# Altium PCB versi 1.0.PcbDoc (part 1 of 2)
Units mm, origin at the board's own origin, x right, y up, seen from the top; angles counter-clockwise.
Board outline 227.58 x 135.13 mm, 2 copper layers (Top Layer, Bottom Layer); 54 components, 49 nets, 360 pads, 39 vias.
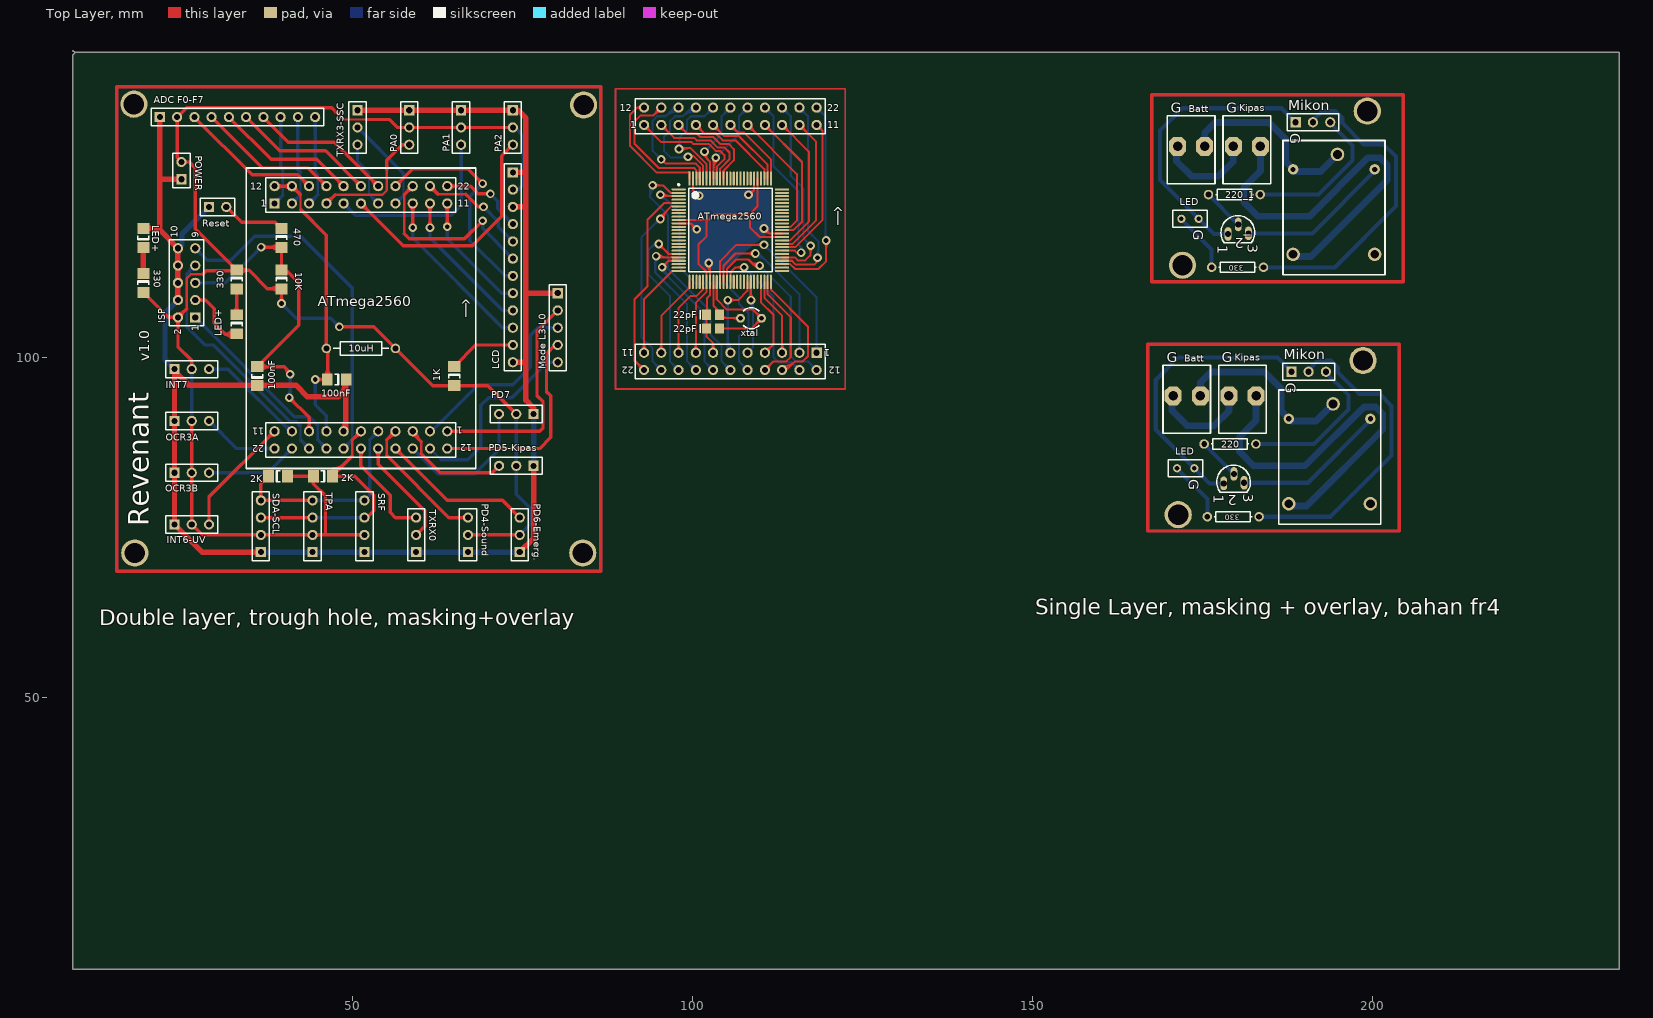
[diagram p0: Top Layer view]
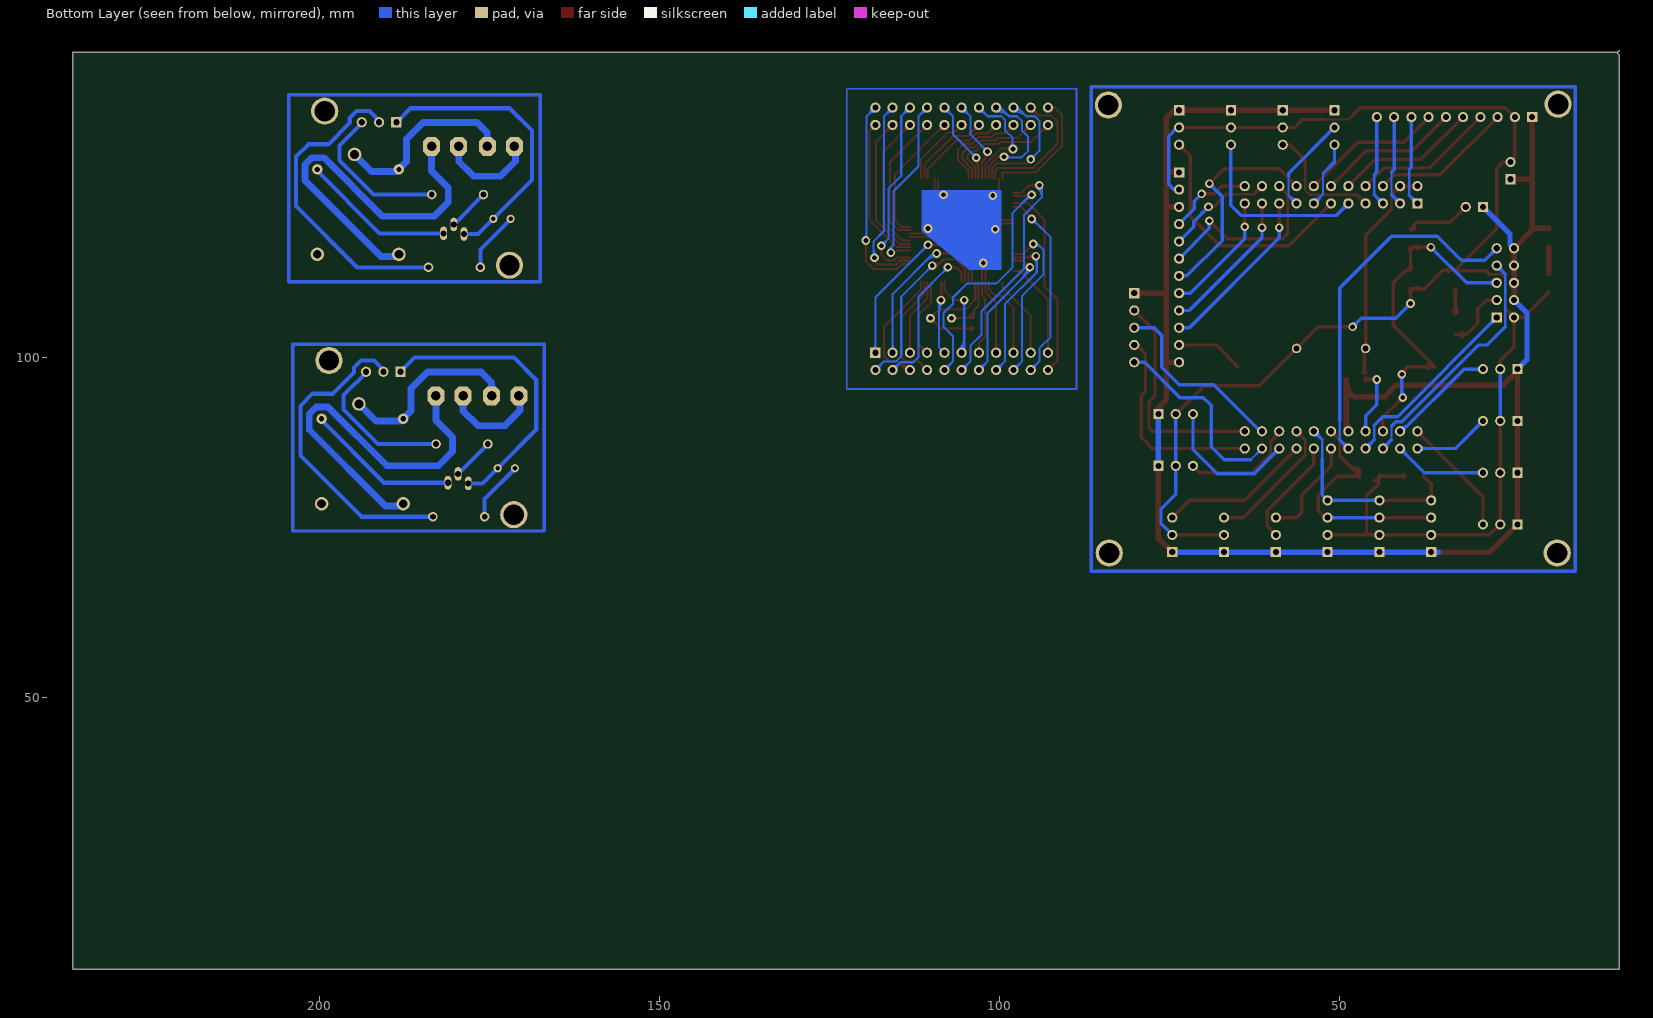
[diagram p1: Bottom Layer view, seen from below]

## Layer stack, top to bottom
Top Layer: signal copper 0.0356
Dielectric: dielectric 0.32, FR-4, Dk 4.8
Bottom Layer: signal copper 0.0356

## Board outline
9.144,144.907 8.763,144.526 8.763,10.033 236.347,10.033 236.347,144.907 9.017,144.907 8.763,145.161

## Design rules (kind name [scope] priority, off if disabled: settings)
Clearance [All] p1: gap=0.254
PolygonConnect [All] p1: connectstyle=Relief reliefconductorwidth=0.254 reliefentries=4 polygonreliefangle="90 Angle"
RoutingVias [All] p1: holewidth=0.711 width=1.27 viastyle="Through Hole" minholewidth=0.711 minwidth=1.27 maxholewidth=0.711 maxwidth=1.27
SilkscreenOverComponentPads [All] p1: minsilkscreentomaskgap=0.254
SolderMaskExpansion [All] p1: expansion=0.102
Width [All] p1: maxlimit=2 minlimit=0.2 preferedwidth=0.5 minimp=50.000000 maximp=50.000000 favimp=50.000000
27 further rules are at their usual default settings.

## Classes and differential pairs
component class Bawah: 100nF "ADC F0-F7" PD6-Emerg.

## Components (designator, comment, footprint, x,y, rotation, side; value= is the part's Value field where it differs from the comment)
1K "Res2" 1206 64.897,97.282 r270 top (schematic designator R.LCD)
2 "Comment" AXIAL-0.3 179.534,76.581 r0 top
2K "Res2" 1206 38.989,82.55 r0 top (schematic designator R.SDA)
2K "Res2" 1206 45.593,82.55 r180 top (schematic designator R.SCL)
10K "Res2" 1206 39.497,111.506 r270 top (schematic designator R.res1)
10uH "10uH" AXIAL-0.4 51.181,101.346 r0 top (schematic designator L)
22pF "Cap" 0805 102.997,104.267 r0 top (schematic designator 22pF1)
22pF "" 0805 102.997,106.299 r0 top
100nF "Cap" 1206 47.625,96.774 r180 top (schematic designator C)
100nF "Cap" 1206 35.941,97.282 r90 top (schematic designator C.res)
220 "Res1" AXIAL-0.3 179.066,87.285 r180 top (schematic designator R1)
220_1 "Res1" AXIAL-0.3 179.701,123.988 r180 top (schematic designator R1)
330 "Res2" 1206 19.177,110.998 r270 top (schematic designator R.Pow)
330 "Res2" 1206 32.893,111.506 r270 top (schematic designator R.ISP)
470 "Res2" 1206 39.497,117.602 r270 top (schematic designator R.res2)
_2 "Comment" AXIAL-0.3 180.169,113.284 r0 top
"ADC F0-F7" "Header 10" HDR1X10 21.59,135.382 r0 top (schematic designator ADC)
ATmega2560 "ATmega2560-16AU" 100A_M 105.537,118.745 r0 top (schematic designator U1)
Batt "" BIGCON2 172.734,94.381 r0 top
Batt "" BIGCON2 173.369,131.084 r0 top
Header.A "Header 11X2A" HDR2X11_CEN#1 118.237,100.711 r180 top
Header.A "Header 11X2A" HDR2X11_CEN#2 63.881,89.154 r180 top
Header.B "Header 11X2A" HDR2X11_CEN#2 92.837,134.239 r0 top
Header.B "Header 11X2A" HDR2X11_CEN#1 38.481,122.682 r0 top
INT6-UV "Header 3" HDR1X3 23.749,75.438 r0 top (schematic designator UVTron)
INT7 "Header 3" HDR1X3 23.749,98.298 r0 top
ISP "ISP" HDR2X5 26.797,105.918 r90 top (schematic designator ISP_S1)
Kipas "" BIGCON2 180.934,94.381 r0 top
Kipas "" BIGCON2 181.569,131.084 r0 top
LCD "Header 12" HDR1X12 73.533,127.254 r270 top
LED "Comment" RAD-0.1 172.537,83.716 r0 top
LED "Comment" RAD-0.1 173.172,120.419 r0 top
LED+ "LED1" 1206 19.177,117.602 r90 top (schematic designator Led.Pow)
LED+ "LED1" 1206 32.893,104.902 r270 top (schematic designator Led.ISP)
Mikon "mikon-driver" HDR1X3 188.087,97.917 r0 top (schematic designator P2)
Mikon "mikon-driver" HDR1X3 188.722,134.62 r0 top (schematic designator P2)
"Mode L3-L0" "Header 4" HDR1X5 80.137,109.474 r270 top (schematic designator DIP.SW)
OCR3A "Header 3" HDR1X3 23.749,90.678 r0 top
OCR3B "Header 3" HDR1X3 23.749,83.058 r0 top
PA0 "Header 3" HDR1X3 58.293,136.398 r270 top
PA1 "Header 3" HDR1X3 65.913,136.398 r270 top
PA2 "Header 3" HDR1X3 73.533,136.398 r270 top
PD4-Sound "Header 3" HDR1X3 66.929,71.374 r90 top (schematic designator Sound)
PD5-Kipas "Header 3" HDR1X3 76.581,84.074 r180 top (schematic designator Kipas)
PD6-Emerg. "Header 3" HDR1X3 74.549,71.374 r90 top (schematic designator Emergency)
PD7 "Header 3" HDR1X3 76.581,91.694 r180 top
POWER "Header 2" HDR1X2 24.765,126.238 r90 top (schematic designator Switch)
Reset "SW-PB" HDR1X2 28.829,122.174 r0 top (schematic designator S1)
SDA-SCL "Header 4" HDR1X4 44.069,71.374 r90 top (schematic designator I2C)
SRF "Header 4" HDR1X4 51.689,71.374 r90 top
TPA "Header 4" HDR1X4 36.449,71.374 r90 top
TXRX0 "Header 3" HDR1X3 59.309,71.374 r90 top (schematic designator USART0)
TXRX3-SSC "Header 3" HDR1X3 50.673,136.398 r270 top (schematic designator SSC)
xtal "XTAL" BCY-W2/D3.1 108.585,105.791 r90 top (schematic designator kristal)

## Footprints (in the part's own frame and the unit in brackets; to place one, negate y for a bottom-side part, rotate by r counter-clockwise, add the part's x,y. Pads: shape width x height; smd on the part's side, far side on the other; paste and mask are expansions set on the pad)
100A_M [mm] "Thin QFP, 100-Leads, Body 14x14mm, Pitch 0.5mm, IPC Low Density"
  oval 2.1x0.3 smd: 1(-7.6,6) 2(-7.6,5.5) 3(-7.6,5) 4(-7.6,4.5) 5(-7.6,4) 6(-7.6,3.5) 7(-7.6,3) 8(-7.6,2.5) 9(-7.6,2) 10(-7.6,1.5) 11(-7.6,1) 12(-7.6,0.5) 13(-7.6,0) 14(-7.6,-0.5) 15(-7.6,-1) 16(-7.6,-1.5) 17(-7.6,-2) 18(-7.6,-2.5) 19(-7.6,-3) 20(-7.6,-3.5) 21(-7.6,-4) 22(-7.6,-4.5) 23(-7.6,-5) 24(-7.6,-5.5) 25(-7.6,-6) 51(7.6,-6) 52(7.6,-5.5) 53(7.6,-5) 54(7.6,-4.5) 55(7.6,-4) 56(7.6,-3.5) 57(7.6,-3) 58(7.6,-2.5) 59(7.6,-2) 60(7.6,-1.5) 61(7.6,-1) 62(7.6,-0.5) 63(7.6,0) 64(7.6,0.5) 65(7.6,1) 66(7.6,1.5) 67(7.6,2) 68(7.6,2.5) 69(7.6,3) 70(7.6,3.5) 71(7.6,4) 72(7.6,4.5) 73(7.6,5) 74(7.6,5.5) 75(7.6,6)
  oval 0.3x2.1 smd: 26(-6,-7.6) 27(-5.5,-7.6) 28(-5,-7.6) 29(-4.5,-7.6) 30(-4,-7.6) 31(-3.5,-7.6) 32(-3,-7.6) 33(-2.5,-7.6) 34(-2,-7.6) 35(-1.5,-7.6) 36(-1,-7.6) 37(-0.5,-7.6) 38(0,-7.6) 39(0.5,-7.6) 40(1,-7.6) 41(1.5,-7.6) 42(2,-7.6) 43(2.5,-7.6) 44(3,-7.6) 45(3.5,-7.6) 46(4,-7.6) 47(4.5,-7.6) 48(5,-7.6) 49(5.5,-7.6) 50(6,-7.6) 76(6,7.6) 77(5.5,7.6) 78(5,7.6) 79(4.5,7.6) 80(4,7.6) 81(3.5,7.6) 82(3,7.6) 83(2.5,7.6) 84(2,7.6) 85(1.5,7.6) 86(1,7.6) 87(0.5,7.6) 88(0,7.6) 89(-0.5,7.6) 90(-1,7.6) 91(-1.5,7.6) 92(-2,7.6) 93(-2.5,7.6) 94(-3,7.6) 95(-3.5,7.6) 96(-4,7.6) 97(-4.5,7.6) 98(-5,7.6) 99(-5.5,7.6) 100(-6,7.6)
  silkscreen extent -7.72,-6.15 6.15,6.82, body extent -7,-7 7,7, height 1.2
0805 [mm] "Chip Capacitor; Body 2.0 x 1.2 mm (LxW typ)"
  rect 1.3x1.5 smd: 1(-0.95,0) 2(0.95,0)
  silkscreen extent -1.9,-0.65 -1.9,0.65
1206 [mm] "Chip Capacitor; Body 3.2 x 1.6 mm (LxW typ)"
  rect 1.6x1.8 smd: 1(-1.4,0) 2(1.4,0)
  silkscreen extent -0.3,-0.8 0.3,0.8
AXIAL-0.3 [mm] "Axial Device, Thru-Hole; 2 Leads; 0.3 in Pin Spacing"
  round 1.4 hole 0.85: 1(-3.81,0) 2(3.81,0)
  silkscreen extent -2.77,-0.76 2.77,0.76
AXIAL-0.4 [mm] "Axial Device, Thru-Hole; 2 Leads; 0.4 in Pin Spacing"
  round 1.4 hole 0.85: 1(-5.08,0) 2(5.08,0)
  silkscreen extent -4.06,-1.02 4.06,1.02
BCY-W2/D3.1 [mm] "Crystal, Thru-Hole; 2 Leads; Body 3.1 x 8.2 mm (Dia.xH)"
  round 1.3 hole 0.7: 1(0,1.55) 2(0,-1.55)
  silkscreen extent -1.55,-1.19 1.55,1.17
BIGCON2 [mil]
  oct 98.42x110 hole 55: 1(-80,0) 2(77.48,0)
  silkscreen extent -139,-217 137,177
HDR1X2 [mm] "Connector; Header; 2 Position"
  rect 1.5x1.5 hole 0.9: 1(0,0)
  round 1.5 hole 0.9: 2(2.54,0)
  silkscreen extent -1.27,-1.27 3.81,1.27
HDR1X3 [mm] "Connector; Header; 3 Position"
  rect 1.5x1.5 hole 0.9: 1(0,0)
  round 1.5 hole 0.9: 2(2.54,0) 3(5.08,0)
  silkscreen extent -1.27,-1.27 6.35,1.27
HDR1X4 [mm] "Connector; Header; 4 Position"
  rect 1.5x1.5 hole 0.9: 1(0,0)
  round 1.5 hole 0.9: 2(2.54,0) 3(5.08,0) 4(7.62,0)
  silkscreen extent -1.27,-1.27 8.89,1.27
HDR1X5 [mm] "Connector; Header; 5 Position"
  rect 1.5x1.5 hole 0.9: 1(0,0)
  round 1.5 hole 0.9: 2(2.54,0) 3(5.08,0) 4(7.62,0) 5(10.16,0)
  silkscreen extent -1.27,-1.27 11.43,1.27
HDR1X10 [mm] "Connector; Header; 10 Position"
  rect 1.5x1.5 hole 0.9: 1(0,0)
  round 1.5 hole 0.9: 2(2.54,0) 3(5.08,0) 4(7.62,0) 5(10.16,0) 6(12.7,0) 7(15.24,0) 8(17.78,0) 9(20.32,0) 10(22.86,0)
  silkscreen extent -1.27,-1.27 24.13,1.27
HDR1X12 [mm] "Connector; Header; 12 Position"
  rect 1.5x1.5 hole 0.9: 1(0,0)
  round 1.5 hole 0.9: 2(2.54,0) 3(5.08,0) 4(7.62,0) 5(10.16,0) 6(12.7,0) 7(15.24,0) 8(17.78,0) 9(20.32,0) 10(22.86,0) 11(25.4,0) 12(27.94,0)
  silkscreen extent -1.27,-1.27 29.21,1.27
HDR2X5 [mm] "Connector; Header; 5x2 Position"
  rect 1.5x1.5 hole 0.9: 1(0,0)
  round 1.5 hole 0.9: 2(0,2.54) 3(2.54,0) 4(2.54,2.54) 5(5.08,0) 6(5.08,2.54) 7(7.62,0) 8(7.62,2.54) 9(10.16,0) 10(10.16,2.54)
  silkscreen extent -1.27,-1.27 11.43,3.81
HDR2X11_CEN#1 [mm] "Connector; Header; 11x2 Position"
  rect 1.5x1.5 hole 0.9: 1(0,0)
  round 1.5 hole 0.9: 2(2.54,0) 3(5.08,0) 4(7.62,0) 5(10.16,0) 6(12.7,0) 7(15.24,0) 8(17.78,0) 9(20.32,0) 10(22.86,0) 11(25.4,0) 12(0,2.54) 13(2.54,2.54) 14(5.08,2.54) 15(7.62,2.54) 16(10.16,2.54) 17(12.7,2.54) 18(15.24,2.54) 19(17.78,2.54) 20(20.32,2.54) 21(22.86,2.54) 22(25.4,2.54)
  silkscreen extent -1.27,-1.27 26.67,3.81
HDR2X11_CEN#2 [mm] "Connector; Header; 11x2 Position"
  round 1.5 hole 0.9: 1(0,0) 2(2.54,0) 3(5.08,0) 4(7.62,0) 5(10.16,0) 6(12.7,0) 7(15.24,0) 8(17.78,0) 9(20.32,0) 10(22.86,0) 11(25.4,0) 12(0,2.54) 13(2.54,2.54) 14(5.08,2.54) 15(7.62,2.54) 16(10.16,2.54) 17(12.7,2.54) 18(15.24,2.54) 19(17.78,2.54) 20(20.32,2.54) 21(22.86,2.54) 22(25.4,2.54)
  silkscreen extent -1.27,-1.27 26.67,3.81
RAD-0.1 [mm] "Radial Cap, Thru-Hole; 2 Leads; 0.1 in Pin Spacing"
  round 1.2 hole 0.7: 1(-1.27,0) 2(1.27,0)
  silkscreen extent -2.54,-1.27 2.54,1.27

## Part data
1K 2K 2K 10K 220 220_1 330 330 470: "Resistor"
10uH: library part INDUCTOR
22pF 100nF 100nF: "Capacitor"
22pF: library part Cap, "Capacitor"
"ADC F0-F7": "Header, 10-Pin"
ATmega2560: "8-bit AVR Microcontroller, 4.5-5.5V, 256KB Flash, 4KB EEPROM, 8KB SRAM, 86 GPIO pins, 100-pin TQFP, Industrial Grade (-40°C to 85°C), Pb-Free"
Header.A Header.A Header.B Header.B: "Header, 11-Pin, Dual row"
INT6-UV INT7 OCR3A OCR3B PA0 PA1 PA2 PD4-Sound PD5-Kipas PD6-Emerg. PD7 TXRX0 TXRX3-SSC: "Header, 3-Pin"
ISP: library part "Header 5X2", "Header, 5-Pin, Dual row"
LCD: "Header, 12-Pin"
LED+ LED+: "Typical RED GaAs LED"
Mikon Mikon: library part "Header 5", "Header, 5-Pin"
"Mode L3-L0" SDA-SCL SRF TPA: "Header, 4-Pin"
POWER: "Header, 2-Pin"
Reset: "Switch"
xtal: "Crystal Oscillator"

## Free pads (board coordinates)
  round 4 hole 3: 0(171.434,76.881) 0(172.069,113.584) 0(198.628,99.568) 0(199.263,136.271) 2(17.78,137.287) 2(17.907,71.247) 2(83.82,71.247) 2(83.947,137.16)
  round 2 hole 1.3: 0(199.71,78.489) 0(200.345,115.192) 1(187.71,78.489) 1(188.345,115.192) 4(194.234,93.189) 4(194.869,129.892)
  oval 1x2 hole 0.9: 1(178.134,81.481) 1(178.769,118.184) 2(179.634,82.881) 2(180.269,119.584) 3(181.134,81.581) 3(181.769,118.284)
  round 1.524 hole 0.762: 2(187.71,90.989) 2(188.345,127.692) 3(199.71,90.989) 3(200.345,127.692)

## Via types
v1: diameter 1.27, hole 0.711, Top Layer to Bottom Layer, 39 vias

## Nets (pads, with @x,y where several pads share a name; then routed paths per layer and width w, separated by ;. In a path a pad name is that pad's centre, name@x,y a point inside that pad or via, vN(x,y) a via of type N, cw(c..) or ccw(c..) an arc to the next point about the centre after c; other vN are vias at no path point)
GND: 100nF.1 "ADC F0-F7.1" "Mode L3-L0.1" Header.A.7@48.641,89.154 INT6-UV.1 INT7.1 ISP.4 ISP.6 ISP.8 ISP.10 LCD.1 LCD.3 LCD.12 LED+.2@19.177,119.002 OCR3A.1 OCR3B.1 PA0.1 PA1.1 PA2.1 PD4-Sound.1 PD5-Kipas.1 PD6-Emerg..1 PD7.1 POWER.1 Reset.1 SDA-SCL.1 SRF.1 TPA.1 TXRX0.1 TXRX3-SSC.1 | length 275.1
  Top Layer w0.8: LED+.2@19.177,119.002 21.333,119.002 21.59,118.745 ; 21.59,135.382 21.59,126.238 ; INT7.1@23.749,98.298 INT7.1@23.749,98.044 ; ISP.4@24.01,108.705 ccw(c23.412,109.303) 24.257,109.303 ccw(c25.102,109.303) ISP.4@24.504,108.705 ; ISP.6@24.01,110.751 cw(c23.412,110.153) 24.257,110.153 cw(c25.102,110.153) ISP.6@24.504,110.751 ; ISP.6@24.01,111.245 ccw(c23.412,111.843) 24.257,111.843 ccw(c25.102,111.843) ISP.6@24.504,111.245 ; ISP.8@24.01,113.291 cw(c23.412,112.693) 24.257,112.693 cw(c25.102,112.693) ISP.8@24.504,113.291 ; ISP.8@24.01,113.785 ccw(c23.412,114.383) 24.257,114.383 ccw(c25.102,114.383) ISP.8@24.504,113.785 ; ISP.10@24.01,115.831 cw(c23.412,115.233) 24.257,115.233 cw(c25.102,115.233) ISP.10@24.504,115.831 ; ISP.4@24.257,108.458 ISP.6@24.257,110.998 ISP.8@24.257,113.538 ISP.10@24.257,116.078 21.59,118.745 ; POWER.1@24.765,126.238 21.59,126.238 ; 35.433,71.374 27.813,71.374 INT6-UV.1@23.749,75.438 OCR3B.1@23.749,83.058 OCR3A.1@23.749,90.678 INT7.1@23.749,98.044 ; 48.228,94.583 ccw(c46.787,96.024) 100nF.1@48.825,96.024 ; Header.A.7@48.394,89.401 ccw(c46.99,90.805) 48.975,90.805 ; Header.A.7@48.641,89.154 48.975,89.488 48.975,95.33 ; 100nF.1@48.975,96.774 48.975,95.33 ; TXRX3-SSC.1@50.673,136.398 PA0.1@58.293,136.398 PA1.1@65.913,136.398 PA2.1@73.533,136.398 74.295,136.398 75.438,135.255 75.438,127.381 ; LCD.12@73.533,99.314 75.311,99.314 75.438,99.187 ; LCD.3@73.533,122.174 75.438,122.174 ; LCD.1@73.533,127.254 75.311,127.254 75.438,127.381 ; PD6-Emerg..1@74.549,71.374 76.581,73.406 PD5-Kipas.1@76.581,84.074 ; PD7.1@76.581,91.694 76.581,92.583 75.438,93.726 75.438,99.187 ; 80.137,109.474 75.438,109.474 ; 21.59,118.745 21.59,126.238 ; INT7.1@23.749,98.044 25.861,95.932 41.609,95.932 43.307,94.234 47.879,94.234 48.975,95.33 ; 75.438,99.187 75.438,109.474 ; 75.438,109.474 75.438,122.174 ; 75.438,122.174 75.438,127.381
  Bottom Layer w0.8: INT7.1@23.749,98.298 22.352,99.695 22.352,106.553 ISP.4@24.257,108.458 ; ISP.10@24.257,116.428 ccw(c24.257,117.273) 24.854,116.675 ; ISP.10@24.607,116.078 cw(c25.452,116.078) 24.854,116.675 ; Reset.1@28.829,122.174 24.854,118.199 24.854,116.675 ; 35.433,71.374 43.053,71.374 50.673,71.374 58.293,71.374 65.913,71.374 73.533,71.374 ; PD5-Kipas.1@76.581,84.074 PD7.1@76.581,91.694
NetADC_3: "ADC F0-F7.3" Header.B.14@43.561,125.222 | length 23
  Top Layer w0.5: 26.67,135.382 35.179,126.873 41.91,126.873 Header.B.14@43.561,125.222 ; Header.B.14@43.061,125.222 ccw(c41.854,125.222) 42.707,126.076 ccw(c43.561,126.929) Header.B.14@43.561,125.722
NetADC_4: "ADC F0-F7.4" Header.B.15@46.101,125.222 | length 23
  Top Layer w0.5: 29.21,135.382 36.703,127.889 43.434,127.889 Header.B.15@46.101,125.222 ; Header.B.15@45.601,125.222 ccw(c44.394,125.222) 45.247,126.076 ccw(c46.101,126.929) Header.B.15@46.101,125.722
NetADC_5: "ADC F0-F7.5" Header.B.16@48.641,125.222 | length 23
  Top Layer w0.5: 31.75,135.382 37.973,129.159 44.704,129.159 Header.B.16@48.641,125.222 ; Header.B.16@48.141,125.222 ccw(c46.934,125.222) 47.787,126.076 ccw(c48.641,126.929) Header.B.16@48.641,125.722
NetADC_6: "ADC F0-F7.6" Header.B.17@51.181,125.222 | length 23
  Top Layer w0.5: 34.29,135.382 39.243,130.429 45.974,130.429 Header.B.17@51.181,125.222 ; Header.B.17@50.681,125.222 ccw(c49.474,125.222) 50.327,126.076 ccw(c51.181,126.929) Header.B.17@51.181,125.722
NetADC_7: "ADC F0-F7.7" Header.B.18@53.721,125.222 | length 23
  Top Layer w0.5: 36.83,135.382 40.513,131.699 47.244,131.699 Header.B.18@53.721,125.222 ; Header.B.18@53.221,125.222 ccw(c52.014,125.222) 52.867,126.076 ccw(c53.721,126.929) Header.B.18@53.721,125.722
NetADC_8: "ADC F0-F7.8" Header.B.1@38.481,122.682 | length 15.2
  Bottom Layer w0.35: 39.66,123.861 39.66,127.671
  Bottom Layer w0.5: Header.B.1@38.481,122.682 39.66,123.861 ; Header.B.1@38.481,123.182 ccw(c38.481,124.389) 39.335,123.536 ccw(c40.188,122.682) Header.B.1@38.981,122.682 ; 39.37,135.382 39.37,127.961 39.66,127.671
NetADC_9: "ADC F0-F7.9" Header.B.2@41.021,122.682 | length 15.3
  Bottom Layer w0.35: 42.291,123.952 42.291,127.254
  Bottom Layer w0.5: Header.B.2@41.021,122.682 42.291,123.952 ; Header.B.2@41.021,123.182 ccw(c41.021,124.389) 41.875,123.536 ccw(c42.728,122.682) Header.B.2@41.521,122.682 ; 41.91,135.382 41.91,127.635 42.291,127.254
NetADC_10: "ADC F0-F7.10" Header.B.3@43.561,122.682 | length 15.3
  Bottom Layer w0.35: 44.831,123.952 44.831,126.873
  Bottom Layer w0.5: Header.B.3@43.561,122.682 44.831,123.952 ; Header.B.3@43.561,123.182 ccw(c43.561,124.389) 44.415,123.536 ccw(c45.268,122.682) Header.B.3@44.061,122.682 ; 44.45,135.382 44.45,127.254 44.831,126.873
NetC.res_2: 10K.1 100nF.2@35.941,98.682 470.2 Header.A.9@43.561,89.154 ISP.5 | length 69.5
  Top Layer w0.5: 100nF.2@35.991,98.632 cw(c36.112,98.632) 100nF.2@36.026,98.717 ; 100nF.2@36.491,98.632 cw(c37.819,98.632) 36.88,99.571 ; v1(36.496,116.252) 39.497,116.252 39.497,112.856 40.179,112.856 42.037,110.998 42.037,104.728 35.941,98.632 39.925,98.632 v1@40.64,97.917 ; v1@36.768,115.98 cw(c37.425,115.323) 37.425,116.252 cw(c37.425,117.181) v1@36.768,116.524 ; 36.903,98.42 cw(c37.415,97.908) 37.415,98.632 cw(c37.415,99.356) 36.903,98.844 ; 38.535,116.04 ccw(c38.023,115.528) 38.023,116.252 ccw(c38.023,116.976) 38.535,116.464 ; 10K.1@39.285,113.068 ccw(c38.773,113.58) 39.497,113.58 ccw(c40.221,113.58) 10K.1@39.709,113.068 ; 470.2@39.285,116.04 cw(c38.773,115.528) 39.497,115.528 cw(c40.221,115.528) 470.2@39.709,116.04 ; 39.93,98.627 cw(c38.839,97.536) v1@40.382,97.536 ; 10K.1@40.247,112.556 cw(c40.247,111.996) 40.643,112.392 ; v1@40.64,93.722 cw(c40.64,92.793) 41.297,93.45 cw(c41.954,94.107) v1@41.025,94.107 ; v1(40.64,94.107) 43.561,91.186 Header.A.9@43.561,89.154 ; Header.A.9@43.207,89.508 ccw(c42.354,90.361) 43.561,90.361 ccw(c44.768,90.361) Header.A.9@43.915,89.508
  Bottom Layer w0.5: ISP.5@26.797,110.998 31.242,110.998 v1(36.496,116.252) ; ISP.5@27.151,110.644 cw(c28.004,109.791) 28.004,110.998 cw(c28.004,112.205) ISP.5@27.151,111.352 ; v1@36.111,116.252 cw(c35.182,116.252) 35.839,115.595 cw(c36.496,114.938) v1@36.496,115.867 ; v1@40.368,94.379 ccw(c39.404,95.343) 40.767,95.343 ; v1@40.495,97.264 cw(c39.838,96.607) 40.767,96.607 cw(c41.696,96.607) v1@41.039,97.264 ; v1(40.64,94.107) 40.767,94.234 v1(40.767,97.536) ; 40.767,94.73 ccw(c41.263,94.73) v1@40.912,94.379
NetC_2: 10uH.1 100nF.2@46.225,96.774 Header.A.8@46.101,89.154 Header.B.12@38.481,125.222 Header.B.13@41.021,125.222 | length 54.6
  Top Layer w0.35: 42.291,121.793 42.291,123.952
  Top Layer w0.5: Header.B.12@38.481,125.222 Header.B.13@41.021,125.222 42.291,123.952 ; Header.B.12@38.835,124.868 cw(c39.688,124.015) 39.688,125.222 cw(c39.688,126.429) Header.B.12@38.835,125.576 ; Header.B.13@40.667,124.868 ccw(c39.814,124.015) 39.814,125.222 ccw(c39.814,126.429) Header.B.13@40.667,125.576 ; Header.B.13@41.021,124.722 cw(c41.021,123.515) 41.875,124.368 cw(c42.728,125.222) Header.B.13@41.521,125.222 ; 42.291,121.793 46.062,118.022 46.101,117.983 10uH.1@46.101,101.346 46.275,101.172 46.275,98.248 ; v1(44.45,96.774) 100nF.2@46.275,96.774 ; v1@44.722,96.502 cw(c45.379,95.845) 45.379,96.774 cw(c45.379,97.703) v1@44.722,97.046 ; 100nF.2@46.063,96.562 ccw(c45.551,96.05) 45.551,96.774 ccw(c45.551,97.498) 100nF.2@46.063,96.986 ; 46.063,97.736 ccw(c45.551,98.248) 46.275,98.248 ; 46.487,97.736 cw(c46.999,98.248) 46.275,98.248
  Bottom Layer w0.5: v1@44.178,96.502 cw(c43.521,95.845) 44.45,95.845 cw(c45.379,95.845) v1@44.722,96.502 ; v1(44.45,96.774) 44.45,93.091 46.101,91.44 Header.A.8@46.101,89.154 ; Header.A.8@45.747,89.508 ccw(c44.894,90.361) 46.101,90.361 ccw(c47.308,90.361) Header.A.8@46.455,89.508
NetDIP.SW_1: "Mode L3-L0.2" Header.A.1@63.881,89.154 | length 33.2
  Top Layer w0.5: Header.A.1@63.881,89.154 77.47,89.154 77.978,89.662 77.978,93.472 77.089,94.361 77.089,103.886 80.137,106.934
NetDIP.SW_2: "Mode L3-L0.3" Header.A.2@61.341,89.154 | length 27.9
  Bottom Layer w0.5: Header.A.2@61.341,89.154 61.595,89.154 68.453,96.012 73.533,96.012 76.073,98.552 76.073,103.251 77.216,104.394 80.137,104.394
NetDIP.SW_3: "Mode L3-L0.4" Header.A.12@63.881,86.614 | length 30.7
  Top Layer w0.5: Header.A.12@63.881,86.614 77.47,86.614 79.121,88.265 79.121,94.361 78.486,94.996 78.486,100.584 79.756,101.854 80.137,101.854
NetDIP.SW_4: "Mode L3-L0.5" Header.A.13@61.341,86.614 | length 29
  Bottom Layer w0.35: Header.A.13@61.341,86.614 62.992,84.963
  Bottom Layer w0.5: 62.992,84.963 66.929,84.963 68.834,86.868 68.834,92.964 69.977,94.107 73.406,94.107 78.613,99.314 80.137,99.314
NetEmergency_3: Header.A.15@56.261,86.614 PD6-Emerg..3 | length 23.2
  Top Layer w0.5: Header.A.15@56.261,86.114 cw(c56.261,84.907) 57.115,85.76 ; Header.A.15@56.761,86.614 ccw(c57.968,86.614) 57.115,85.76 ; PD6-Emerg..3@74.549,76.454 72.009,78.994 63.881,78.994 57.115,85.76
NetHeader.A_3: Header.A.3@58.801,89.154 PD5-Kipas.3 | length 18.7
  Top Layer w0.35: 60.071,85.852 60.071,87.63
  Top Layer w0.5: Header.A.3@58.801,88.654 cw(c58.801,88.06) 59.221,88.48 ; Header.A.3@58.801,89.154 58.801,88.9 60.071,87.63 ; Header.A.3@59.301,89.154 ccw(c61.121,89.154) 59.834,87.867 ; 60.071,85.852 62.865,83.058 70.485,83.058 PD5-Kipas.3@71.501,84.074
NetHeader.A_4: Header.A.4@56.261,89.154 PD4-Sound.3 | length 21.7
  Top Layer w0.35: 54.991,85.598 54.991,87.884
  Top Layer w0.5: 54.991,85.598 64.135,76.454 PD4-Sound.3@66.929,76.454 ; 54.991,87.884 Header.A.4@56.261,89.154 ; Header.A.4@55.761,89.154 cw(c54.554,89.154) 55.407,88.3 cw(c56.261,87.447) Header.A.4@56.261,88.654
NetHeader.A_5: 2K.1@37.589,82.55 Header.A.5@53.721,89.154 SDA-SCL.4 SRF.4 TPA.4 | length 32.2
  Top Layer w0.5: 2K.1@37.589,82.55 36.449,81.41 TPA.4@36.449,78.994 SDA-SCL.4@44.069,78.994
  Bottom Layer w0.35: 52.451,85.09 52.451,87.884
  Bottom Layer w0.5: SDA-SCL.4@44.069,78.994 SRF.4@51.689,78.994 52.451,79.756 52.451,85.09 ; 52.451,87.884 Header.A.5@53.721,89.154 ; Header.A.5@53.221,89.154 cw(c52.014,89.154) 52.867,88.3 cw(c53.721,87.447) Header.A.5@53.721,88.654
NetHeader.A_6: 2K.1@46.993,82.55 Header.A.6@51.181,89.154 SDA-SCL.3 SRF.3 TPA.3 | length 40.8
  Top Layer w0.35: 49.911,85.518 49.911,87.884
  Top Layer w0.5: TPA.3@36.449,76.454 SDA-SCL.3@44.069,76.454 ; 2K.1@46.943,82.6 ccw(c46.943,82.721) 2K.1@47.028,82.635 ; 2K.1@46.943,83.1 ccw(c46.943,84.428) 47.882,83.489 ; 46.943,83.6 ccw(c46.943,86.135) 48.735,84.342 ; 2K.1@47.155,82.338 cw(c47.667,81.826) 47.667,82.55 cw(c47.667,83.274) 2K.1@47.155,82.762 ; 49.911,85.518 46.943,82.55 50.292,82.55 53.086,79.756 53.086,77.47 SRF.3@52.07,76.454 ; 49.911,87.884 Header.A.6@51.181,89.154 ; Header.A.6@50.681,89.154 cw(c49.474,89.154) 50.327,88.3 cw(c51.181,87.447) Header.A.6@51.181,88.654
  Bottom Layer w0.5: SDA-SCL.3@44.069,76.454 SRF.3@51.689,76.454
NetHeader.A_10: Header.A.10@41.021,89.154 INT7.3 | length 17.9
  Bottom Layer w0.5: INT7.3@28.829,98.298 31.623,98.298 31.694,98.227 40.767,89.154 Header.A.10@41.021,89.154 ; 39.734,90.187 ccw(c41.021,91.474) Header.A.10@41.021,89.654 ; 40.347,89.574 cw(c39.927,89.154) Header.A.10@40.521,89.154
NetHeader.A_11: Header.A.11@38.481,89.154 INT6-UV.3 | length 19.6
  Top Layer w0.5: INT6-UV.3@28.829,75.438 28.829,79.502 Header.A.11@38.481,89.154 ; Header.A.11@37.981,89.154 cw(c36.774,89.154) 37.627,88.3 cw(c38.481,87.447) Header.A.11@38.481,88.654
NetHeader.A_14: Header.A.14@58.801,86.614 PD7.3 | length 21.6
  Bottom Layer w0.5: Header.A.14@58.801,86.114 cw(c58.801,84.907) 59.655,85.76 ; Header.A.14@59.301,86.614 ccw(c60.508,86.614) 59.655,85.76 ; PD7.3@71.501,91.694 71.501,86.487 67.945,82.931 62.484,82.931 59.655,85.76
NetHeader.A_16: Header.A.16@53.721,86.614 TXRX0.2 | length 17.9
  Top Layer w0.5: Header.A.16@53.367,86.26 cw(c52.514,85.407) 53.721,85.407 cw(c54.928,85.407) Header.A.16@54.075,86.26 ; Header.A.16@53.721,86.614 53.721,84.328 60.563,77.486 60.563,75.168 TXRX0.2@59.309,73.914
NetHeader.A_17: Header.A.17@51.181,86.614 TXRX0.3 | length 17.2
  Top Layer w0.5: Header.A.17@50.827,86.26 cw(c49.974,85.407) 51.181,85.407 cw(c52.388,85.407) Header.A.17@51.535,86.26 ; Header.A.17@51.181,86.614 51.181,84.074 55.499,79.756 55.499,77.216 56.261,76.454 TXRX0.3@59.309,76.454
NetHeader.A_18: Header.A.18@48.641,86.614 ISP.9 | length 56.4
  Bottom Layer w0.35: 49.911,87.884 49.911,90.678
  Bottom Layer w0.5: ISP.9@26.797,115.578 cw(c26.797,114.371) 27.651,115.224 cw(c28.504,116.078) ISP.9@27.297,116.078 ; ISP.9@26.797,116.078 28.575,114.3 32.004,114.3 35.56,117.856 42.291,117.856 49.911,110.236 49.911,90.678 ; Header.A.18@48.641,86.614 49.911,87.884 ; Header.A.18@48.641,87.114 ccw(c48.641,88.321) 49.495,87.468 ccw(c50.348,86.614) Header.A.18@49.141,86.614
NetHeader.A_19: Header.A.19@46.101,86.614 ISP.1 | length 32.4
  Bottom Layer w0.35: 44.831,87.884 44.831,90.043
  Bottom Layer w0.5: ISP.1@26.797,105.418 cw(c26.797,104.211) 27.651,105.064 cw(c28.504,105.918) ISP.1@27.297,105.918 ; ISP.1@26.797,105.918 41.402,91.313 43.561,91.313 44.831,90.043 ; 44.831,87.884 Header.A.19@46.101,86.614 ; Header.A.19@45.601,86.614 ccw(c44.394,86.614) 45.247,87.468 ccw(c46.101,88.321) Header.A.19@46.101,87.114
NetHeader.A_20: Header.A.20@43.561,86.614 ISP.7 | length 40
  Bottom Layer w0.35: 25.527,104.521 25.527,112.268 ; 42.291,87.884 42.291,89.916
  Bottom Layer w0.5: 25.527,104.521 28.194,101.854 29.464,101.854 40.767,90.551 41.656,90.551 42.291,89.916 ; 25.527,112.268 ISP.7@26.797,113.538 ; ISP.7@26.297,113.538 cw(c25.09,113.538) 25.943,112.684 cw(c26.797,111.831) ISP.7@26.797,113.038 ; 42.291,87.884 Header.A.20@43.561,86.614 ; Header.A.20@43.061,86.614 ccw(c41.854,86.614) 42.707,87.468 ccw(c43.561,88.321) Header.A.20@43.561,87.114
NetHeader.A_21: Header.A.21@41.021,86.614 OCR3B.3 | length 15.6
  Bottom Layer w0.5: OCR3B.3@28.829,83.058 37.465,83.058 Header.A.21@41.021,86.614 ; Header.A.21@40.521,86.614 cw(c39.314,86.614) 40.167,85.76 cw(c41.021,84.907) Header.A.21@41.021,86.114
NetHeader.A_22: Header.A.22@38.481,86.614 OCR3A.3 | length 13.2
  Bottom Layer w0.5: OCR3A.3@28.829,90.678 32.893,86.614 Header.A.22@38.481,86.614 ; Header.A.22@38.127,86.26 ccw(c37.274,85.407) 37.274,86.614 ccw(c37.274,87.821) Header.A.22@38.127,86.968
NetHeader.B_4: Header.B.4@46.101,122.682 PA0.3 | length 20.3
  Top Layer w0.35: 47.371,123.952 54.356,123.952 54.991,124.587 54.991,127.635
  Top Layer w0.5: Header.B.4@46.101,122.682 47.371,123.952 ; Header.B.4@46.101,123.182 ccw(c46.101,124.389) 46.955,123.536 ccw(c47.808,122.682) Header.B.4@46.601,122.682 ; 54.991,127.635 54.991,129.032 57.277,131.318 PA0.3@58.293,131.318
NetHeader.B_5: Header.B.5@48.641,122.682 PA1.3 | length 29.4
  Bottom Layer w0.5: Header.B.5@48.641,122.182 cw(c48.641,120.975) 49.495,121.828 cw(c50.348,122.682) Header.B.5@49.141,122.682 ; Header.B.5@48.641,122.682 50.419,120.904 64.389,120.904 65.913,122.428 PA1.3@65.913,131.318
NetHeader.B_6: Header.B.6@51.181,122.682 PA2.3 | length 38.2
  Top Layer w0.5: Header.B.6@51.181,122.182 cw(c51.181,120.975) 52.035,121.828 cw(c52.888,122.682) Header.B.6@51.681,122.682 ; Header.B.6@51.181,122.682 57.404,116.459 67.564,116.459 71.882,120.777 71.882,129.667 PA2.3@73.533,131.318
NetHeader.B_7: Header.B.7@53.721,122.682 TXRX3-SSC.3 | length 10.6
  Bottom Layer w0.35: 52.324,127.127 52.36,127.091 52.36,124.043 52.867,123.536
  Bottom Layer w0.5: TXRX3-SSC.3@50.673,131.318 50.673,128.778 52.324,127.127 ; Header.B.7@53.221,122.682 ccw(c52.014,122.682) 52.867,123.536 ccw(c53.721,124.389) Header.B.7@53.721,123.182
NetHeader.B_8: Header.B.8@56.261,122.682 TXRX3-SSC.2 | length 15.2
  Bottom Layer w0.35: 57.115,123.536 57.44,123.861 57.44,126.71 57.404,126.746
  Bottom Layer w0.5: TXRX3-SSC.2@50.673,133.858 57.404,127.127 57.404,126.746 ; Header.B.8@56.261,123.182 ccw(c56.261,124.389) 57.115,123.536 ccw(c57.968,122.682) Header.B.8@56.761,122.682
NetHeader.B_9: Header.B.9@58.801,122.682 LCD.10 | length 28.4
  Top Layer w0.5: Header.B.9@58.447,122.328 cw(c57.594,121.475) 58.801,121.475 cw(c60.008,121.475) Header.B.9@59.155,122.328 ; v1@58.529,119.398 ccw(c57.872,120.055) 58.801,120.055 ccw(c59.73,120.055) v1@59.073,119.398 ; v1@58.801,119.38 Header.B.9@58.801,122.682
  Bottom Layer w0.5: v1(58.801,119.126) 58.801,117.602 72.009,104.394 LCD.10@73.533,104.394
NetHeader.B_10: Header.B.10@61.341,122.682 LCD.9 | length 25.3
  Top Layer w0.5: Header.B.10@60.987,122.328 cw(c60.134,121.475) 61.341,121.475 cw(c62.548,121.475) Header.B.10@61.695,122.328 ; v1@61.069,119.398 ccw(c60.412,120.055) 61.341,120.055 ccw(c62.27,120.055) v1@61.613,119.398 ; v1(61.341,119.126) v1@61.341,119.634 ; v1@61.341,119.507 v1@61.341,119.634 ; 61.341,119.761 v1@61.341,119.634 ; Header.B.10@61.341,122.682 v1@61.341,119.634
  Bottom Layer w0.5: v1(61.341,119.126) 61.341,117.602 72.009,106.934 LCD.9@73.533,106.934
NetHeader.B_11: Header.B.11@63.881,122.682 LCD.8 | length 22.5
  Top Layer w0.5: Header.B.11@63.527,122.328 cw(c62.674,121.475) 63.881,121.475 cw(c65.088,121.475) Header.B.11@64.235,122.328 ; v1@63.609,119.525 ccw(c62.952,120.182) 63.881,120.182 ccw(c64.81,120.182) v1@64.153,119.525 ; v1(63.881,119.253) Header.B.11@63.881,122.682
  Bottom Layer w0.5: 63.881,118.618 v1(63.881,119.253) ; v1@63.881,119.634 v1(63.881,119.253) ; LCD.8@73.533,109.474 71.882,109.474 63.881,117.475 v1(63.881,119.253)
NetHeader.B_19: Header.B.19@56.261,125.222 LCD.7 | length 37.3
  Top Layer w0.5: Header.B.19@56.261,125.222 58.801,127.762 66.929,127.762 v1(69.088,125.603) ; Header.B.19@56.261,125.722 ccw(c56.261,126.929) 57.115,126.076 ccw(c57.968,125.222) Header.B.19@56.761,125.222 ; v1@68.703,125.603 ccw(c67.774,125.603) 68.431,126.26 ccw(c69.088,126.917) v1@69.088,125.988
  Bottom Layer w0.5: v1@68.703,125.603 cw(c67.774,125.603) 68.431,124.946 cw(c69.088,124.289) v1@69.088,125.218 ; v1(69.088,125.603) 67.183,123.698 67.183,117.221 72.39,112.014 LCD.7@73.533,112.014
NetHeader.B_20: Header.B.20@58.801,125.222 LCD.6 | length 29.8
  Top Layer w0.35: 57.531,118.237 57.531,123.952
  Top Layer w0.5: 57.531,118.237 58.293,117.475 66.421,117.475 v1(69.088,120.142) ; 57.531,123.952 Header.B.20@58.801,125.222 ; Header.B.20@58.301,125.222 cw(c57.094,125.222) 57.947,124.368 cw(c58.801,123.515) Header.B.20@58.801,124.722
  Bottom Layer w0.5: v1(69.088,120.142) 69.088,118.999 LCD.6@73.533,114.554
NetHeader.B_21: Header.B.21@61.341,125.222 LCD.5 | length 17.9
  Top Layer w0.35: 62.52,124.043 66.584,124.043
  Top Layer w0.5: Header.B.21@61.341,124.722 cw(c61.341,123.515) 62.195,124.368 cw(c63.048,125.222) Header.B.21@61.841,125.222 ; Header.B.21@61.341,125.222 62.52,124.043 ; 66.584,124.043 68.453,122.174 v1(69.215,122.174)
  Bottom Layer w0.5: v1(69.215,122.174) 71.374,120.015 71.374,119.253 LCD.5@73.533,117.094
NetHeader.B_22: Header.B.22@63.881,125.222 LCD.4 | length 16.2
  Top Layer w0.5: Header.B.22@63.881,125.222 67.31,125.222 68.453,124.079 v1(70.231,124.079) v1@70.485,124.079 ; Header.B.22@64.235,124.868 cw(c65.088,124.015) 65.088,125.222 cw(c65.088,126.429) Header.B.22@64.235,125.576 ; v1@70.213,123.807 ccw(c69.556,123.15) 69.556,124.079 ccw(c69.556,125.008) v1@70.213,124.351
  Bottom Layer w0.5: v1(70.231,124.079) 71.334,122.976 71.334,121.884 73.533,119.684 LCD.4@73.533,119.634
NetISP_S1_3: ISP.3 LED+.2@32.893,103.502 | length 13
  Top Layer w0.5: ISP.3@26.797,108.458 28.321,108.458 29.591,107.188 29.591,105.029 31.218,103.402 ; ISP.3@27.151,108.104 cw(c28.004,107.251) 28.004,108.458 cw(c28.004,109.665) ISP.3@27.151,108.812 ; 31.972,103.067 ccw(c31.218,102.386) 31.218,103.402 ; 31.972,103.737 cw(c31.218,104.418) 31.218,103.402 ; LED+.2@32.893,103.402 31.218,103.402
NetLCD_11: 1K.1 LCD.11 | length 9.9
  Top Layer w0.5: 1K.1@64.897,98.682 68.069,101.854 LCD.11@73.533,101.854
NetLed.ISP_1: 330.2@32.893,110.106 LED+.1@32.893,106.302 | length 6.8
  Top Layer w0.5: LED+.1@32.539,106.756 ccw(c31.686,107.609) 32.893,107.609 ccw(c34.1,107.609) LED+.1@33.247,106.756 ; 330.2@32.681,109.944 cw(c32.169,109.432) 32.893,109.432 cw(c33.617,109.432) 330.2@33.105,109.944 ; LED+.1@32.893,106.402 330.2@32.893,110.156
NetLed.Pow_1: 330.1@19.177,112.398 LED+.1@19.177,116.202 | length 3.8
  Top Layer w0.8: 330.1@19.177,112.398 LED+.1@19.177,116.202
NetPower_2: 
NetR.res2_1: 470.1 Reset.2 | length 10.8
  Top Layer w0.5: Reset.2@31.369,122.174 33.655,119.888 38.561,119.888 470.1@39.497,118.952 ; 470.1@38.75,119.699 cw(c38.195,119.144) 470.1@38.936,118.886 ; 470.1@39.313,119.136 cw(c39.031,118.853) 470.1@39.408,118.722